# Altium PCB CM4IOv5.PcbDoc (part 3 of 4)
Units mm, origin at the board's own origin, x right, y up, seen from the top; angles counter-clockwise.
Board outline 160 x 90 mm, 4 copper layers (F.Cu, In1.Cu, In2.Cu, B.Cu); 151 components, 247 nets, 944 pads, 782 vias.
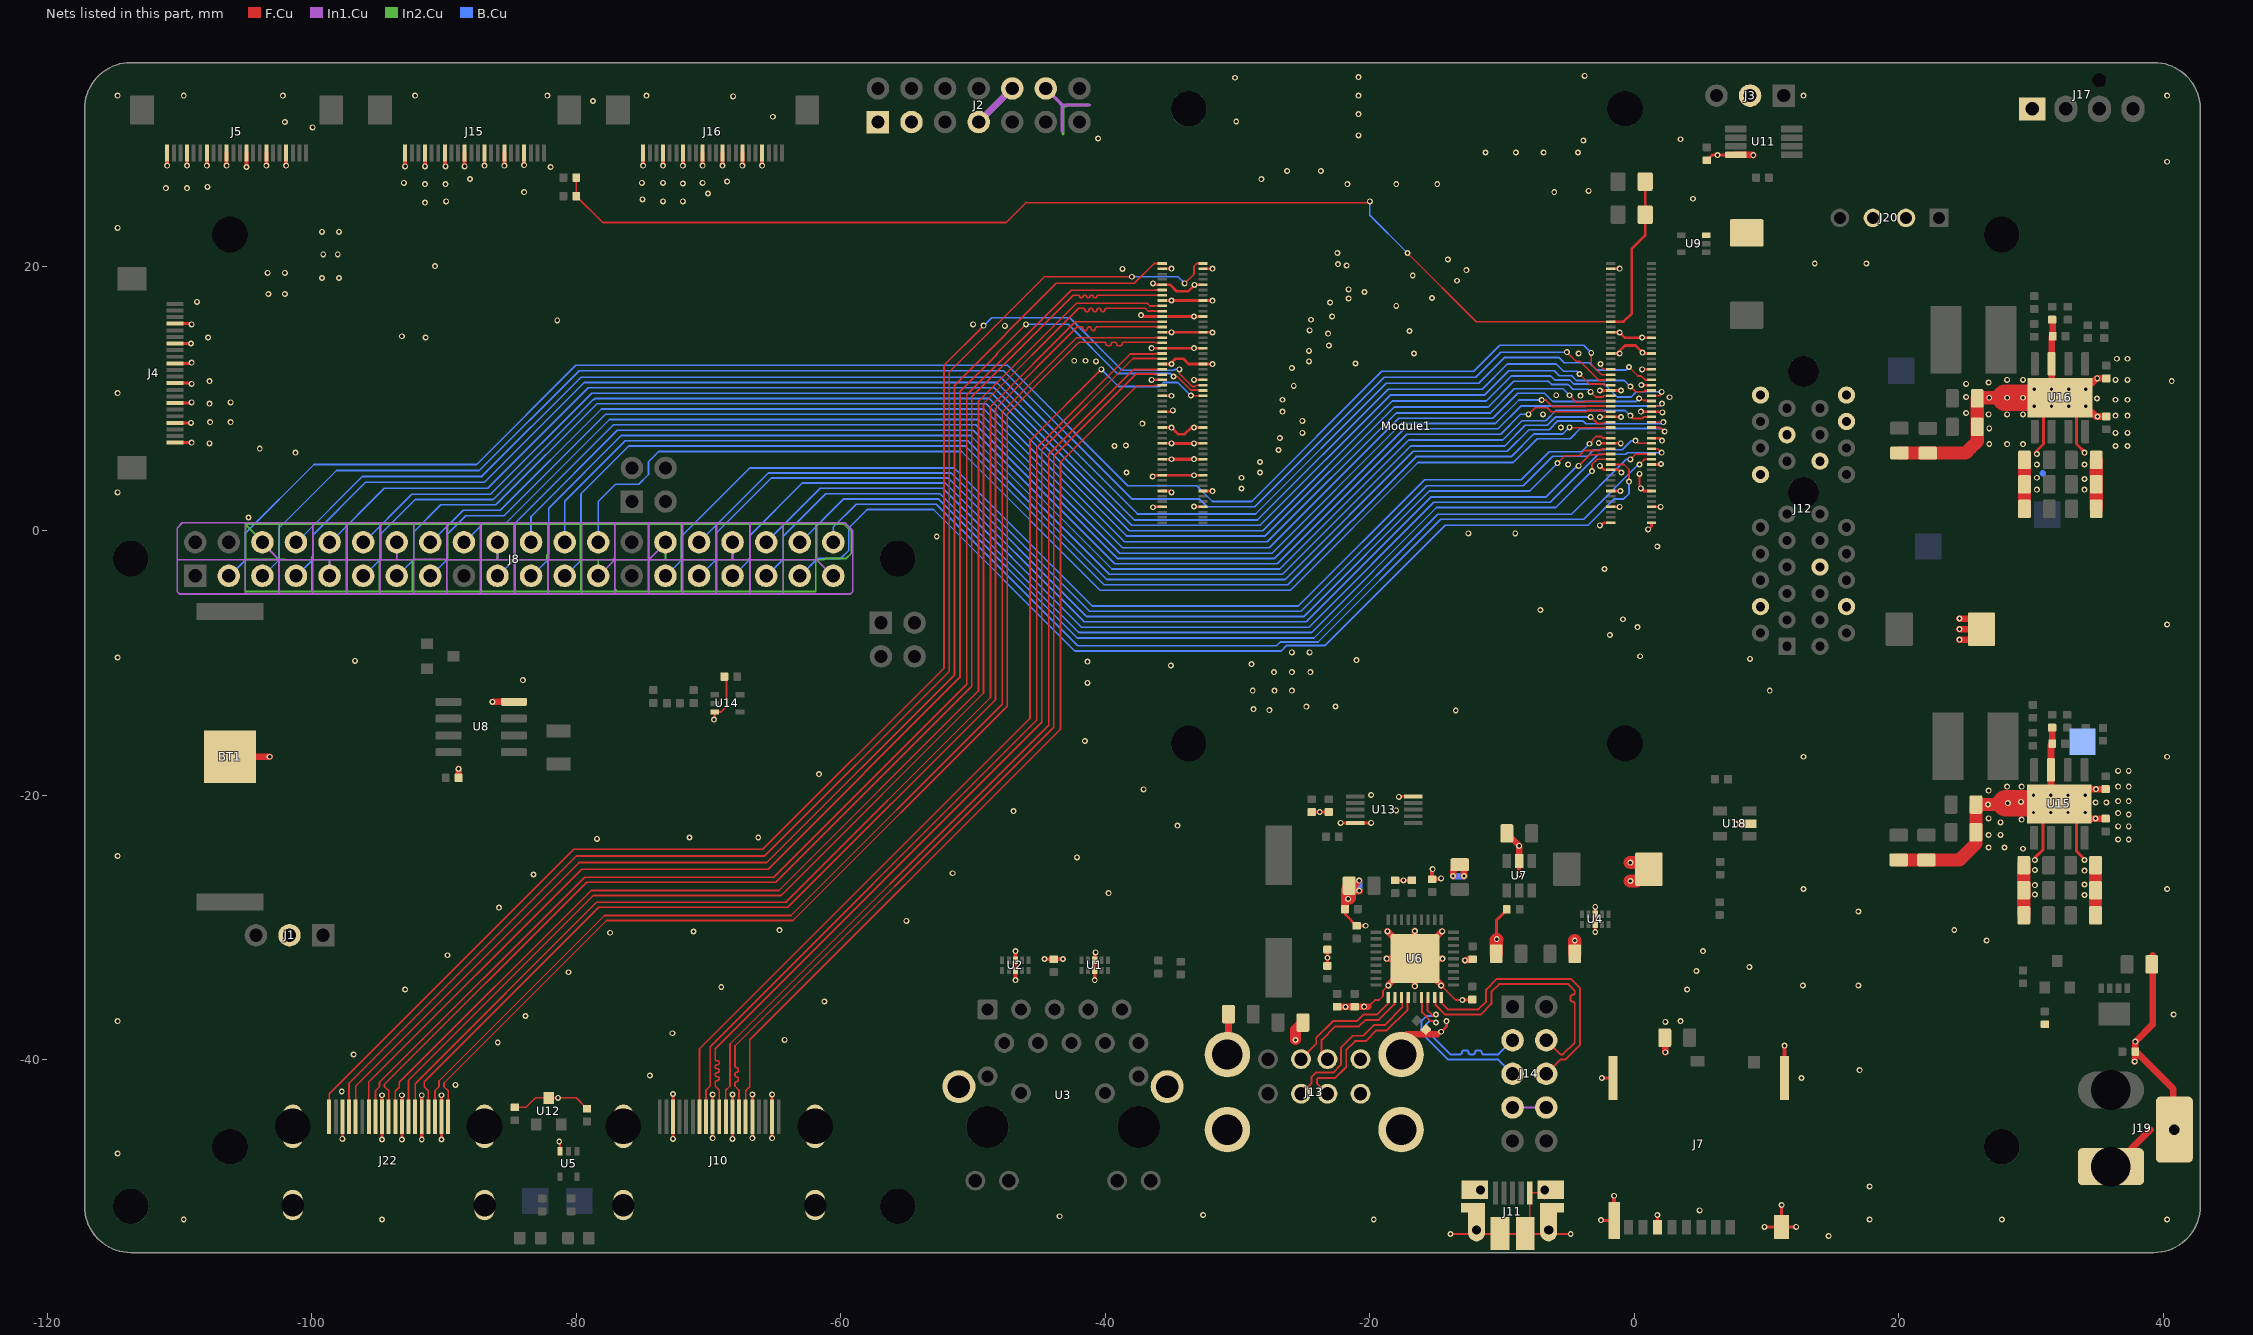
[diagram p5: the nets of this part, all layers, seen from the top]

## Via types
v1: diameter 0.45, hole 0.25, F.Cu to B.Cu, tented both sides, 782 vias

## Nets (pads, with @x,y where several pads share a name; then routed paths per layer and width w, separated by ;. In a path a pad name is that pad's centre, name@x,y a point inside that pad or via, vN(x,y) a via of type N, cw(c..) or ccw(c..) an arc to the next point about the centre after c; other vN are vias at no path point) (continued)
GND: BT1.2 C1.2 C2.2 C3.2 C4.2 C5.2 C6.2 C7.2 C8.2 C9.2 C10.2 C11.2 C12.2 C13.2 C14.2 C15.2 C16.2 C17.2 C18.2 C19.2 C20.2 C21.2 C22.2 C23.2 C25.2 C26.2 C27.2 C28.2 C30.2 C31.2 C32.2 C33.2 C34.2 C35.2 C36.2 C37.2 C38.2 C39.2 C41.2 C42.2 C43.2 C44.2 C45.2 C46.2 C47.2 C49.2 C51.2 C52.2 C58.2 C59.2 C60.2 C62.2 C63.2 C64.2 J1.2 J2.1 J2.3 J2.7 J2.10 J2.12 J3.2 J4.1 J4.4 J4.7 J4.10 J4.13 J4.16 J4.19 J5.1 J5.4 J5.7 J5.10 J5.13 J5.16 J5.19 J7.6 J7.11 J8.6 J8.9 J8.14 J8.20 J8.25 J8.30 J8.34 J8.39 J10.2 J10.5 J10.8 J10.11 J10.17 J10.SH1 J10.SH2 J10.SH3 J10.SH4 J11.5 J11.6 J12.A4 J12.A12 J12.A15 J12.A18 J12.B4 J12.B7 J12.B13 J12.B16 J12.B18 J13.4 J13.8 J13.MT1 J13.MT2 J13.MT3 J13.MT4 J14.7 J14.8 J15.1 J15.4 J15.7 J15.10 J15.13 J15.16 J15.19 J16.1 J16.4 J16.7 J16.10 J16.13 J16.16 J16.19 J17.1 J19.2 J19.3 J20.2 J20.3 J22.2 J22.5 J22.8 J22.11 J22.17 J22.SH1 J22.SH2 J22.SH3 J22.SH4 Module1.1 Module1.2 Module1.7 Module1.8 Module1.13 Module1.14 Module1.22 Module1.23 Module1.32 Module1.33 Module1.42 Module1.43 Module1.52 Module1.53 Module1.59 Module1.60 Module1.65 Module1.66 Module1.71 Module1.74 Module1.98 Module1.107 Module1.108 Module1.113 Module1.114 Module1.119 Module1.120 Module1.125 Module1.126 Module1.131 Module1.132 Module1.137 Module1.138 Module1.144 Module1.150 Module1.155 Module1.156 Module1.161 Module1.162 Module1.167 Module1.168 Module1.173 Module1.174 Module1.179 Module1.180 Module1.185 Module1.186 Module1.191 Module1.192 Module1.197 Module1.198 R11.2 R12.2 R13.2 R14.2 R15.1 R16.2 R26.2 R28.2 R30.2 R36.2 TP6.1 U1.3 U1.8 U2.3 U2.8 U3.19 U3.20 U4.3 U4.8 U5.3 U6.37 U7.2 U8.4 U9.3 U11.4 U12.3 U13.5 U13.10 U14.3 U15.7 U15.9 U16.7 U16.9 U18.2 | length 882.7
  F.Cu w0.13: C12.2@-84.9,-43.615 -83.815,-43.615 -83.1,-42.9 v1(-81.4,-42.9) ; U12.3@-82.1,-42.9 -80.015,-42.9 C13.2@-79.2,-43.715 ; v1(-81.3,-46.2) -81.25,-46.25 U5.3@-81.25,-46.95 ; U14.3@-69.532,-13.722 -69.087,-13.722 -68.65,-13.285 C22.2@-68.65,-11.203 ; v1@-35,9 v1(-34.9,9.1) ; -20.11,-36.01 -19.6,-35.5 -19.3,-35.5 -19,-35.2 -19,-34.8 v1(-18.6,-34.4) ; v1(-14.6,-34.4) -13.5,-35.5 v1(-13,-35.5) ; v1(-13.9,-53.2) -13.489,-53.2 -12.182,-53.2 -10.112,-53.2 -8.432,-53.2 -6.362,-53.2 -5.054,-53.2 v1(-4.8,-53.2) ; J11.6@-7.9,-52.813 J11.5@-7.9,-50.08 J11.6@-6.985,-50.08 ; v1(-2.555,12.6) -2.555,12.448 -2.307,12.2 Module1.60@-1.78,12.2 ; v1@-1.1,8.6 v1(-1,8.6) ; v1(0.4,4.3) 0.4,3.3 v1(0.5,3.2) ; J7.6@1.75,-53.165 1.75,-52.068 v1(1.75,-51.75) ; 1.8,7 1.9,7 ; v1(2.019,5.038) 2.057,5 v1@2.1,5
  F.Cu w0.2: v1@-69.532,-14.232 U14.3@-69.532,-13.722 ; v1(-37.3,16.3) -37.2,16.2 Module1.180@-35.7,16.2 v1(-33.3,16.2) Module1.179@-32.6,16.2 ; v1(-36.5,11.4) Module1.156@-35.7,11.4 ; v1(-36.5,13.8) Module1.168@-35.7,13.8 v1(-33.3,13.8) Module1.167@-32.62,13.8 ; v1(-36.425,4.1) -36.325,4.2 Module1.120@-35.7,4.2 v1@-33.3,4.2 ; v1(-36.4,1.77) -36.37,1.8 Module1.108@-35.7,1.8 ; v1(-36.4,18.7) -36.3,18.6 Module1.192@-35.7,18.6 -35.1,18.6 -34.6,18.1 -33.746,18.1 v1(-33.261,18.585) -33.246,18.6 Module1.191@-32.6,18.6 ; Module1.114@-35.7,3 -35.1,3 v1(-35,2.9) ; Module1.126@-35.7,5.4 v1(-35,5.4) ; Module1.132@-35.7,6.6 v1(-35,6.6) ; Module1.138@-35.7,7.8 -35.01,7.8 v1(-35,7.79) -34.71,7.5 -34.7,7.5 -34.5,7.3 -34,7.3 -33.5,7.8 v1(-33.3,7.8) Module1.137@-32.6,7.8 ; Module1.144@-35.7,9 -35.55,9 v1@-35,9 ; Module1.150@-35.7,10.2 v1(-35,10.2) ; Module1.162@-35.7,12.6 v1(-35,12.6) -35,12.7 -34.7,13 -34.1,13 -33.7,12.6 Module1.161@-32.62,12.6 ; Module1.174@-35.7,15 v1(-35,15) Module1.173@-32.62,15 ; Module1.186@-35.7,17.4 v1(-35,17.4) Module1.185@-32.62,17.4 ; Module1.198@-35.7,19.8 -35.01,19.8 v1(-35,19.81) ; v1(-33.3,1.83) -33.27,1.8 Module1.107@-32.6,1.8 ; v1(-33.3,4.19) -33.29,4.2 Module1.119@-32.62,4.2 ; v1(-33.3,5.41) Module1.125@-32.61,5.41 ; v1(-33.3,6.6) Module1.131@-32.62,6.6 ; v1(-33.298,11.407) -33.291,11.4 Module1.155@-32.6,11.4 ; Module1.113@-32.6,3 -31.909,3 v1(-31.899,2.99) ; Module1.161@-32.6,12.6 -31.91,12.6 v1(-31.9,12.59) ; Module1.173@-32.6,15 -31.91,15 v1(-31.9,14.99) ; Module1.185@-32.6,17.4 -31.91,17.4 v1(-31.9,17.39) ; Module1.197@-32.6,19.8 -31.91,19.8 v1(-31.9,19.81) ; R14.2@-21.869,-28.622 -21.869,-29.01 C14.2@-20.996,-29.883 ; v1@-17.77,-20.1 U13.10@-16.7,-20.1 ; -14.885,-38.085 v1@-14.7,-37.9 ; v1(-14.6,-37.9) -14.2,-37.5 v1(-14.2,-37.1) ; v1(-2.95,-30.35) U4.3@-2.95,-29.785 U4.8@-2.95,-29.015 v1(-2.95,-28.45) ; v1(-2.683,6.626) -2.657,6.6 Module1.32@-1.78,6.6 -1.022,6.6 v1(-1.019,6.603) ; v1(-2.6,0.4) -2.5,0.4 -2.3,0.6 Module1.2@-1.78,0.6 ; v1(-2.6,4.9) -2.3,4.6 Module1.22@-1.78,4.6 -1.18,4.6 v1(-0.973,4.393) ; v1(-2.6,8.6) Module1.42@-1.78,8.6 v1(-1,8.6) ; v1(-2.6,10.6) Module1.52@-1.78,10.6 v1(-1,10.6) ; Module1.8@-1.78,1.8 v1(-1.1,1.8) ; Module1.14@-1.78,3 v1@-1.1,3 ; Module1.66@-1.78,13.4 v1(-1.1,13.4) -1.1,13.6 -0.7,14 0.1,14 0.1,13.989 v1(0.625,13.463) 0.689,13.4 Module1.65@1.3,13.4 ; Module1.74@-1.78,15 -1.12,15 v1(-1.1,14.98) -0.72,14.6 v1(0.6,14.6) Module1.71@1.3,14.6 ; Module1.98@-1.78,19.8 -1.115,19.8 v1(-1.1,19.815) ; v1(0.5,3.2) 0.7,3 Module1.13@1.3,3 ; v1(0.5,9) Module1.43@1.3,9 2.076,9 v1(2.127,8.949) ; v1(0.533,11.01) 0.542,11 Module1.53@1.3,11 ; v1(0.6,12.2) Module1.59@1.3,12.2 ; v1@1.119,0.145 1.3,0.326 Module1.1@1.3,0.6 ; Module1.7@1.3,1.8 v1(1.995,1.8) ; Module1.23@1.3,5 1.981,5 v1(2.019,5.038) ; Module1.33@1.3,7 1.8,7 ; 1.9,7 v1(2.1,6.8)
  F.Cu w0.23: J4.1@-110.35,6.65 v1(-109.1,6.65) ; J4.4@-110.35,8.15 v1(-109.15,8.15) ; J4.7@-110.35,9.65 v1@-109.15,9.65 ; J4.10@-110.35,11.15 v1@-109.15,11.15 ; J4.13@-110.35,12.65 v1@-109.15,12.65 ; J4.16@-110.35,14.15 v1(-109.15,14.15) ; J4.19@-110.35,15.65 -109.15,15.65 v1(-109.1,15.6) ; v1(-109.45,27.6) J5.4@-109.45,28.55 ; v1(-97.7,-46) J22.17@-97.7,-44.82 ; v1(-94.7,-46.05) v1(-94.7,-42.7) ; v1(-93.2,-46.05) v1(-93.2,-42.7) ; v1@-91.7,-46.1 v1(-91.7,-42.7) ; v1@-90.2,-46.1 v1(-90.2,-42.7) ; v1(-86.95,27.6) J15.13@-86.95,28.55 ; v1(-72.7,-46) v1(-72.7,-42.6) ; v1(-69.7,-45.95) v1(-69.7,-42.65) ; v1(-68.2,-46) v1(-68.2,-42.65) ; v1(-66.7,-45.95) v1(-66.7,-42.65) ; v1(-65.2,-45.95) v1(-65.2,-42.65) ; v1(-35,5.4) -33.31,5.4 v1(-33.3,5.41) ; v1(-35,6.6) v1(-33.3,6.6) ; R11.2@-24.4,-21.285 v1(-23.785,-21.285) C7.2@-23.1,-21.285 ; C8.2@-23.2,-32.915 v1(-23.2,-32.3) C9.2@-23.2,-31.685 ; v1@-22.285,-22.1 v1(-22.2,-22.1) U13.5@-21.1,-22.1 v1(-19.9,-22.1) ; C14.2@-20.996,-29.883 v1(-20.317,-29.883) ; R16.2@-18.082,-26.446 v1(-17.454,-26.446) -17.232,-26.446 R12.2@-16.812,-26.446 ; v1(-13,-35.5) -12.703,-35.5 -12.66,-35.457 C11.2@-12.24,-35.457 ; v1(-10.4,-30.9) -10.4,-29.45 R36.2@-9.635,-28.685 ; v1(-2.52,-52.15) -2.495,-52.175 J7.11@-1.52,-52.175 ; v1(-2.45,-41.4) -2.44,-41.41 J7.11@-1.6,-41.41 ; v1(1.75,-51.75) 1.76,-51.76 J7.6@1.76,-52.675 ; C23.2@5.5,28.015 5.885,28.4 v1(6.3,28.4) 6.325,28.425 U11.4@7.688,28.425 ; v1(9.85,-52.65) J7.11@11.13,-52.65 ; J7.11@11.14,-52.66 12.24,-52.66 v1(12.25,-52.65) ; J7.11@11.15,-52.65 v1(11.15,-51) ; v1(30.3,-24.913) 30.3,-24.75 30.9,-24.15 U15.9@30.9,-21.862 ; v1@30.35,5.75 30.35,5.95 30.95,6.55 U16.9@30.95,8.8 ; U15.9@33.45,-21.912 33.45,-24.25 34.05,-24.85 v1(34.05,-24.913) ; U16.9@33.45,8.8 33.45,6.55 34.1,5.9 v1@34.1,5.75
  F.Cu w0.3: v1(-110.95,27.6) J5.1@-110.95,28.55 ; v1(-107.95,27.6) J5.7@-107.95,28.55 ; v1(-106.45,27.6) J5.10@-106.45,28.55 ; v1(-104.95,27.5) J5.13@-104.95,28.55 ; v1(-103.45,27.6) J5.16@-103.45,28.55 ; v1(-101.95,27.6) J5.19@-101.95,28.55 ; v1(-92.95,27.55) J15.1@-92.95,28.55 ; v1(-91.45,27.555) J15.4@-91.45,28.55 ; v1@-89.95,27.605 J15.7@-89.95,28.55 ; v1(-88.45,27.555) J15.10@-88.45,28.55 ; v1(-85.45,27.6) J15.16@-85.45,28.55 ; v1(-83.95,27.64) J15.19@-83.95,28.55 ; v1(-74.95,27.6) J16.1@-74.95,28.55 ; v1(-73.45,27.6) J16.4@-73.45,28.55 ; v1(-71.95,27.6) J16.7@-71.95,28.55 ; v1(-70.45,27.6) J16.10@-70.45,28.55 ; v1(-68.95,27.6) J16.13@-68.95,28.55 ; v1(-67.45,27.6) J16.16@-67.45,28.55 ; v1(-65.95,27.6) J16.19@-65.95,28.55 ; v1(-46.8,-34) U2.8@-46.8,-33.27 v1(-46.8,-31.8) ; v1(-44.6,-32.4) -44.585,-32.415 C1.2@-43.9,-32.415 -43.48,-32.415 -43.465,-32.4 v1(-43.2,-32.4) ; v1(-40.8,-34) U1.8@-40.8,-33.27 U1.3@-40.8,-32.5 -40.8,-31.96 v1(-40.732,-31.893) ; v1@-15.288,-25.638 R13.2@-15.288,-26.359 v1@-14.659,-26.359 ; v1(-8.7,-26) U7.2@-8.7,-25 ; J7.11@-1.52,-52.675 v1(-1.52,-50.3) ; J7.11@11.36,-41.91 v1(11.36,-38.95)
  F.Cu w0.5: BT1.2@-106.2,-17.1 v1(-103.2,-17.1) ; C46.2@-88.915,-18.7 v1(-88.915,-18.015) ; v1(-86.345,-12.945) U8.4@-84.725,-12.945 ; J13.MT3@-30.687,-40.648 C17.2@-30.687,-36.573 ; R15.1@-22.475,-36.01 v1(-21.84,-36.01) C3.2@-21.15,-36.01 v1@-20.435,-36.01 ; C10.2@-21.456,-26.844 -21.025,-27.275 -20.75,-27.275 v1(-20.8,-27.225) ; C10.2@-21.169,-26.844 v1(-20.8,-26.475) ; v1(-20.425,-36) -20.11,-36.01 ; v1(-18.725,-32.375) -18.718,-32.368 U6.37@-16.596,-32.368 ; v1(-18.664,-30.3) U6.37@-16.596,-32.368 ; v1(-18.6,-34.4) -18.6,-34.372 U6.37@-16.596,-32.368 ; J13.MT4@-17.185,-38.085 -14.885,-38.085 ; v1(-16.596,-34.446) U6.37@-16.596,-32.368 ; v1(-16.596,-30.279) U6.37@-16.596,-32.368 ; v1(-14.6,-34.4) -14.6,-34.364 U6.37@-16.596,-32.368 ; v1(-14.528,-30.3) U6.37@-16.596,-32.368 ; v1(-14.507,-32.368) U6.37@-16.596,-32.368 ; v1(-13.7,-26.125) -13.7,-25.763 C6.2@-13.2,-25.263 ; v1(-12.875,-26.125) C6.2@-12.875,-25.588 ; v1(-12.8,-32.5) -12.635,-32.5 C4.2@-12.545,-32.41 ; C2.2@-9.637,-22.9 v1(-8.7,-23.838) U7.2@-8.7,-25 ; v1(2.35,-39.45) C5.2@2.35,-38.388 ; U11.4@7.688,28.425 8.975,28.425 v1(9,28.4) ; v1(7.7,-22.2) 7.744,-22.156 U18.2@8.699,-22.156 ; v1(24.6,-8.25) C45.2@25.7,-8.25 ; v1(24.6,-7.45) C45.2@26.263,-7.45 ; v1(24.6,-6.65) C45.2@25.35,-6.65 ; U15.9@31.515,-20.028 U15.7@31.515,-18.1 C63.2@31.515,-16.212 ; U16.9@31.565,10.685 U16.7@31.565,12.612 C59.2@31.565,14.615 ; C63.2@31.615,-16.113 C64.2@31.615,-14.913 ; C59.2@31.65,14.7 C60.2@31.65,15.915 ; U15.9@33.265,-19.547 v1(34.915,-19.547) R30.2@35.65,-19.547 ; U16.9@34.15,9.4 34.915,8.635 v1(35.035,8.635) C58.2@35.7,8.635 ; U16.9@34.15,10.7 34.965,11.515 v1(35.015,11.515) R28.2@35.7,11.515 ; U15.9@34.565,-21.778 v1(34.885,-21.778) C62.2@35.65,-21.778 ; J19.2@36.05,-48.3 39.05,-45.3 ; v1(37.85,-40.15) 37.85,-39.855 37.885,-39.82 C36.2@37.885,-39.4 37.885,-38.98 37.9,-38.965 v1(37.9,-38.65) 39.2,-37.35 39.2,-32.1 ; C36.2@37.95,-39.4 40.75,-42.2 J19.3@40.75,-45.3
  F.Cu w0.6: R14.2@-21.869,-28.622 C10.2@-21.869,-27.153
  F.Cu w0.8: v1(-25.619,-38.519) -25.619,-37.756 C20.2@-25.063,-37.2
  F.Cu w1: v1@-21.559,-27.764 C10.2@-21.559,-26.844 ; C21.2@-10.437,-32 -10.437,-31.2 -10.437,-30.971 v1@-10.4,-30.934 ; C19.2@-4.5,-32 v1(-4.5,-31) ; v1(-0.3,-26.5) C16.2@0.213,-26.5 ; v1@-0.3,-25.1 C16.2@0.613,-25.1 ; C33.2@20,-24.9 C32.2@22.1,-24.9 24.6,-24.9 25.838,-23.663 C31.2@25.837,-22.812 C30.2@25.837,-20.713 v1(26.75,-20.713) 28,-20.713 v1@28.1,-20.612 ; C51.2@20.05,5.875 C52.2@22.188,5.875 ; C52.2@22.2,5.863 25.063,5.863 25.45,6.25 25.938,6.737 C49.2@25.937,7.85 C47.2@25.937,10 ; C47.2@25.988,10.05 v1(26.85,10.05) v1@28.05,10.05 ; C43.2@29.463,-29.012 C25.2@29.463,-25.312 ; C41.2@29.513,1.65 C34.2@29.513,5.35 ; C44.2@34.888,-29.012 C26.2@34.888,-25.312 ; C39.2@34.937,1.65 C35.2@34.937,5.35
  F.Cu w2: v1@28.05,10.05 29.45,10.05 U16.9@32.2,10.05 ; v1@28.1,-20.612 29.25,-20.612 U15.9@32.1,-20.612
  In1.Cu w0.13: J8.6@-103.75,-0.93 -102.48,-2.2 ; -102.5,-2.2 -102.5,-4.7 -102.6,-4.8 ; J8.9@-98.67,-3.47 -98.67,-2.268 -98.602,-2.2 ; -94.8,-2.2 -94.85,-2.15 ; J8.14@-93.59,-0.93 -93.59,-2.132 -93.6,-2.142 -93.6,-2.2 ; J8.20@-85.97,-0.93 -85.97,-2.132 -85.902,-2.2 ; J8.25@-78.35,-3.47 -77.08,-2.2 ; -77.25,-2.2 -77.1,-2.05 ; J8.30@-73.27,-0.93 -74.54,-2.2 ; J8.34@-68.19,-0.93 -68.19,-2.132 -68.122,-2.2 ; -66.85,-2.05 -66.95,-2.15 -66.95,-2.2 ; -61.9,-2.2 -61.9,0.6 ; J8.39@-60.57,-3.47 -61.84,-2.2 -66.95,-2.2 ; J14.7@-9.2,-43.62 J14.8@-6.66,-43.62 ; -110.2,-2.2 -110.2,-1.7 -110.2,0.2 -109.8,0.6 -105,0.6 ; -110.2,-2.2 -101.8,-2.2 -97.35,-2.2 -93.6,-2.2 ; -110.2,-2.2 -110.2,-4.6 -110,-4.8 -105,-4.8 ; -105,-4.8 -102.6,-4.8 ; -105,-4.8 -105.05,-4.75 -105.05,-4.35 -105.05,-0.05 -105.05,0.55 -105,0.6 ; -105,0.6 -100,0.6 ; -102.6,-4.8 -99.9,-4.8 ; -100,0.6 -99.95,0.55 -99.95,-0.2 -99.95,-4.2 -99.95,-4.75 -99.9,-4.8 ; -100,0.6 -97.3,0.6 ; -99.9,-4.8 -97.3,-4.8 ; -97.3,-4.8 -94.8,-4.8 ; -97.3,-4.8 -97.35,-4.75 -97.35,-4.35 -97.35,-0.05 -97.35,0.55 -97.3,0.6 ; -97.3,0.6 -94.8,0.6 ; -94.85,-2.15 -94.85,-4.75 -94.8,-4.8 ; -94.85,-2.15 -94.85,0.25 -94.85,0.55 -94.8,0.6 ; -94.8,-4.8 -92.4,-4.8 ; -94.8,0.6 -92.3,0.6 ; -93.6,-2.2 -92.268,-2.182 -89.8,-2.15 -89.75,-2.2 -82.15,-2.2 -77,-2.2 -74.54,-2.2 ; -92.4,-4.8 -89.8,-4.8 ; -92.4,-4.8 -92.3,-4.7 -92.3,0.15 -92.3,0.6 ; -92.3,0.6 -89.8,0.6 ; -89.8,-4.8 -87.3,-4.8 ; -89.8,-4.8 -89.8,-4.25 -89.8,0.6 ; -89.8,0.6 -87.2,0.6 ; -87.3,-4.8 -84.7,-4.8 ; -87.3,-4.8 -87.25,-4.75 -87.25,-4.25 -87.25,-0.1 -87.25,0.55 -87.2,0.6 ; -87.2,0.6 -84.7,0.6 ; -84.7,-4.8 -82.2,-4.8 ; -84.7,-4.8 -84.65,-4.75 -84.65,-4.35 -84.65,-0.25 -84.65,0.55 -84.7,0.6 ; -84.7,0.6 -82.1,0.6 ; -82.2,-4.8 -79.6,-4.8 ; -82.2,-4.8 -82.15,-4.75 -82.15,-4.2 -82.15,-0.25 -82.15,0.55 -82.1,0.6 ; -82.1,0.6 -79.5,0.6 ; -79.6,-4.8 -79.6,-2.2 -79.6,-0.3 -79.6,0.5 -79.5,0.6 ; -79.6,-4.8 -77.1,-4.8 ; -79.5,0.6 -77.1,0.6 ; -77.1,-4.8 -77.1,-4.4 -77.1,-0.15 -77.1,0.6 ; -77.1,-4.8 -74.5,-4.8 ; -77.1,0.6 -74.6,0.6 ; -74.6,0.6 -72,0.6 ; -74.6,0.6 -74.54,0.54 -74.54,-2.2 ; -74.54,-2.2 -66.95,-2.2 ; -74.54,-2.2 -74.54,-4.19 -74.54,-4.76 -74.5,-4.8 ; -74.5,-4.8 -72,-4.8 ; -72,-4.8 -71.95,-4.75 -71.95,-4.15 -71.95,0.55 -72,0.6 ; -72,-4.8 -69.5,-4.8 ; -72,0.6 -69.5,0.6 ; -69.5,-4.8 -66.8,-4.8 ; -69.5,-4.8 -69.45,-4.75 -69.45,-2.05 -69.45,0.15 -69.45,0.55 -69.5,0.6 ; -69.5,0.6 -66.9,0.6 ; -66.9,0.6 -66.85,0.55 -66.85,-0.1 -66.85,-4.35 -66.85,-4.75 -66.8,-4.8 ; -66.9,0.6 -64.5,0.6 ; -66.8,-4.8 -64.3,-4.8 ; -64.5,0.6 -61.9,0.6 ; -64.5,0.6 -64.35,0.45 -64.35,-0.2 -64.35,-4.25 -64.35,-4.75 -64.3,-4.8 ; -64.3,-4.8 -59.3,-4.8 -59.1,-4.6 -59.1,-0.803 -59.1,0 -59.7,0.6 -61.9,0.6
  In1.Cu w0.23: J2.12@-44.5,33.44 -43.26,32.2 ; -43.26,30.24 -43.26,32.2 ; -41.2,32.2 -43.26,32.2
  In1.Cu w0.5: J2.7@-49.58,30.9 J2.10@-47.04,33.44
  In2.Cu w0.13: J8.6@-103.75,-0.93 -102.9,-1.78 -102.9,-1.8 -102.5,-2.2 -102,-2.2 ; J8.6@-103.75,-0.8 -105,0.45 ; J8.9@-98.67,-3.47 -98.67,-2.268 -98.602,-2.2 ; -94.8,-2.2 -94.8,0.05 -94.8,0.5 ; J8.14@-93.59,-0.93 -93.59,-2.132 -93.522,-2.2 ; -89.85,-2.2 -89.8,-2.25 -89.8,-4.3 -89.8,-4.5 -89.7,-4.6 ; -89.8,-2.2 -89.75,-2.15 -89.75,-1.6 -89.75,0.2 -89.75,0.45 -89.7,0.5 ; J8.20@-85.97,-0.93 -85.97,-2.07 -86,-2.1 -86,-2.2 ; -82.2,-2.25 -82.25,-2.2 ; J8.25@-78.35,-3.47 -78.35,-2.25 -78.3,-2.2 ; -78.35,-2.268 -78.4,-2.218 -78.4,-2.2 ; -73.3,-2.2 -73.3,-2.162 -73.27,-2.132 J8.30@-73.27,-0.93 ; -72.05,-4.55 -72.05,-2.2 -72.05,0.45 -72,0.5 ; -68.3,-2.2 -68.19,-2.09 J8.34@-68.19,-0.93 ; -61.84,-2.2 J8.39@-60.57,-3.47 ; -105.05,-2.18 -105,-2.13 -105,0.45 ; -105.05,-2.18 -105.05,-4.55 -105,-4.6 -102.5,-4.6 ; -105.05,-2.18 -102.48,-2.18 ; -105,0.45 -104.95,0.5 -102.5,0.5 ; -102.5,-4.6 -102.48,-4.58 -102.48,-3.92 -102.48,-2.18 ; -102.5,-4.6 -99.9,-4.6 ; -102.5,0.5 -102.48,0.48 -102.48,-2.18 ; -102.5,0.5 -99.9,0.5 ; -102.48,-2.18 -102.02,-2.18 -102,-2.2 ; -102,-2.2 -97.4,-2.2 ; -99.9,-4.6 -97.4,-4.6 ; -99.9,-4.6 -100,-4.5 -100,-4.25 -100,-2.2 -100,-2 -99.95,-1.95 -99.95,0 -99.95,0.45 -99.9,0.5 ; -99.9,0.5 -97.4,0.5 ; -97.4,-4.6 -94.9,-4.6 ; -97.4,-4.6 -97.4,-4.2 -97.4,-2.2 ; -97.4,-2.2 -97.4,0.25 -97.4,0.4 -97.4,0.5 ; -97.4,-2.2 -94.9,-2.2 ; -97.4,0.5 -94.8,0.5 ; -94.9,-4.6 -94.9,-2.2 ; -94.9,-4.6 -92.4,-4.6 ; -94.9,-2.2 -92.4,-2.2 ; -94.8,0.5 -92.3,0.5 ; -92.4,-4.6 -92.4,-4.4 -92.4,-2.2 ; -92.4,-4.6 -89.7,-4.6 ; -92.4,-2.2 -92.3,-2.2 ; -92.3,-2.2 -92.3,-0.05 -92.3,0.5 ; -92.3,-2.2 -89.9,-2.2 -87.2,-2.2 ; -92.3,0.5 -89.7,0.5 ; -89.7,-4.6 -87.1,-4.6 ; -89.7,0.5 -87.2,0.5 ; -87.2,-2.2 -87.2,-4.25 -87.2,-4.5 -87.1,-4.6 ; -87.2,-2.2 -87.2,0.5 ; -87.2,-2.2 -86,-2.2 ; -87.2,0.5 -84.7,0.5 ; -87.1,-4.6 -84.6,-4.6 ; -86,-2.2 -84.7,-2.2 ; -84.7,-2.2 -82.25,-2.2 ; -84.7,-2.2 -84.7,-4.05 -84.7,-4.5 -84.6,-4.6 ; -84.7,-2.2 -84.7,0.5 ; -84.7,0.5 -82.1,0.5 ; -84.6,-4.6 -82,-4.6 ; -82.25,-2.2 -82.25,-1.85 -82.1,-1.7 -82.1,-0.2 -82.1,0.5 ; -82.25,-2.2 -82.1,-2.2 ; -82.1,-2.2 -79.7,-2.2 ; -82.1,-2.2 -82.15,-2.25 -82.15,-4 -82.15,-4.45 -82,-4.6 ; -82.1,0.5 -79.7,0.5 ; -82,-4.6 -79.5,-4.6 ; -79.7,-2.2 -78.4,-2.2 ; -79.7,-2.2 -79.7,0.2 -79.7,0.5 ; -79.7,-2.2 -79.7,-2.3 -79.65,-2.35 -79.65,-4.15 -79.65,-4.45 -79.5,-4.6 ; -79.7,0.5 -77.2,0.5 ; -79.5,-4.6 -77,-4.6 ; -78.4,-2.2 -78.3,-2.2 ; -78.3,-2.2 -77.25,-2.2 -74.55,-2.2 ; -77.2,0.5 -74.5,0.5 ; -77.2,0.5 -77.1,0.4 -77.1,0.15 -77.1,-2.2 -77.1,-4.4 -77,-4.5 -77,-4.6 ; -77,-4.6 -74.5,-4.6 ; -74.55,-2.2 -74.55,-4.35 -74.55,-4.55 -74.5,-4.6 ; -74.55,-2.2 -74.55,-0.1 -74.55,0.45 -74.5,0.5 ; -74.55,-2.2 -61.3,-2.2 -61.2,-2.1 -59.65,-2.1 -59.6,-2.1 -59.2,-1.7 -59.2,-0.703 -59.2,-0.1 -59.8,0.5 -61.9,0.5 ; -74.5,-4.6 -69.4,-4.6 ; -74.5,0.5 -72,0.5 ; -72,0.5 -69.4,0.5 ; -69.4,-4.6 -66.9,-4.6 ; -69.4,-4.6 -69.4,-2.2 -69.4,0.5 ; -69.4,0.5 -66.9,0.5 ; -66.9,-4.6 -66.9,-4.4 -66.9,-2.2 -66.9,-0.1 -66.9,0.5 ; -66.9,-4.6 -64.3,-4.6 ; -66.9,0.5 -64.4,0.5 ; -64.4,0.5 -61.9,0.5 ; -64.4,0.5 -64.35,0.45 -64.35,0.15 -64.35,-2.2 -64.35,-4.55 -64.3,-4.6 ; -64.3,-4.6 -61.9,-4.6 -61.9,-4.2 -61.9,-2.2 -61.9,-2.05 -61.85,-2 -61.85,-0.3 -61.85,0.45 -61.9,0.5
  In2.Cu w0.23: J2.12@-44.5,33.44 -43.405,32.345 -43.405,32.305 -43.2,32.1 ; -43.2,30 -43.2,32.1 ; -41.3,32.2 -42.9,32.2 -43,32.1 -43.2,32.1
  In2.Cu w0.5: J2.7@-49.58,30.9 J2.10@-47.04,33.44
  B.Cu w0.5: v1(-20.8,-27.225) v1(-20.8,-26.475) ; v1(-13.7,-26.125) v1(-12.875,-26.125)
  other v1: 14.7,-53.35 -109.7,-52.1 -94.7,-52.1 -19.7,-52.1 17.8,-52.1 27.8,-52.1 40.3,-52.1 -43.45,-51.85 -32.6,-51.75 4.95,-51.4 17.8,-49.6 -114.7,-47.1 -91.7,-46.05 -90.2,-46.05 -97.75,-42.413 -89.15,-41.912 12.65,-41.4 -74.45,-41.213 17.05,-40.8 -96.85,-39.612 -85.95,-38.713 -64.25,-38.513 -72.75,-38.012 2.35,-37.15 -114.7,-37.1 3.5,-37.1 -83.85,-36.712 40.8,-36.6 -61.25,-35.612 -92.95,-34.7 4,-34.7 -69.05,-34.512 12.75,-34.4 16.95,-34.4 -80.6,-33.4 4.7,-33.3 8.7,-33 -89.75,-32.113 5.2,-31.8 26.65,-31 -77.45,-30.412 -71.15,-30.312 -64.65,-30.212 24.2,-30.2 -55.05,-29.512 16.95,-28.8 -85.85,-28.513 -21.641,-27.845 34.05,-27.563 30.3,-27.513 -39.75,-27.413 12.8,-27.1 40.3,-27.1 30.3,-26.812 34.05,-26.762 -14.6,-26.3 -83.25,-26.013 -51.55,-25.913 34.05,-25.712 30.3,-25.662 -15.25,-25.6 -0.3,-25.11 -42.15,-24.713 -114.7,-24.6 29.4,-24.06 26.8,-23.96 28,-23.96 36.6,-23.363 37.4,-23.363 -78.45,-23.313 -71.45,-23.213 -66.25,-23.213 26.8,-23.012 27.7,-23.01 36.6,-22.363 37.4,-22.363 -34.55,-22.313 27.7,-22.063 29.3,-21.862 26.8,-21.762 37.4,-21.462 36.6,-21.362 -46.95,-21.213 -18,-21.15 28.25,-20.612 34.9,-20.562 35.7,-20.562 29.25,-20.512 36.6,-20.462 37.4,-20.462 -17.8,-20.13 -19.9,-20 26.8,-19.663 -37.1,-19.563 28.2,-19.362 29.3,-19.362 36.6,-19.362 37.4,-19.362 -61.65,-18.413 36.6,-18.163 37.4,-18.163 12.8,-17.1 40.3,-17.1 -41.55,-15.913 -69.6,-14.3 -27.598,-13.58 -13.5,-13.6 -28.8,-13.5 -24.8,-13.31 -22.6,-13.3 -28.85,-12.1 -27.2,-12.1 -25.9,-12.1 10.25,-12.1 -41.35,-11.512 -84.05,-11.31 -27.25,-10.7 -25.9,-10.7 -24.5,-10.7 -35.05,-10.2 -28.95,-10.1 -41.35,-9.912 -96.75,-9.85 -21,-9.8 8.75,-9.7 -114.7,-9.6 0.45,-9.5 -25.9,-9.2 -24.55,-9.2 -1.85,-7.9 0.25,-7.3 40.3,-7.1 -0.85,-6.7 -7.1,-6 -2.25,-2.9 1.75,-1.2 -52.75,-0.45 -12.55,-0.2 -9,-0.2 1.05,0.1 -104.8,1 -114.7,2.9 -1.05,3 30.45,3.1 34.05,3.1 -29.7,3.19 34.05,3.9 -29.7,4 30.45,4 -38.4,4.4 -28.3,4.4 -5,5 30.45,5 34.05,5 -28.3,5.19 30.45,5.8 -101.25,5.9 34.05,5.9 -26.9,6.1 -103.95,6.2 -39.3,6.4 36.4,6.4 37.3,6.4 -38.45,6.44 28.2,6.54 29.4,6.54 26.85,6.55 -107.75,6.6 -26.8,7 -25.1,7.4 36.4,7.4 37.3,7.4 26.85,7.74 -5.55,7.799 -37.2,8.09 -107.7,8.2 -106.15,8.2 -25.1,8.3 36.4,8.7 37.3,8.7 -6.9,8.8 26.8,8.8 28.2,8.8 29.4,8.8 25.1,8.9 -26.6,9 -107.75,9.6 -109.1,9.7 -106.15,9.7 -26.6,9.9 36.4,9.9 37.3,9.9 35,10 28.2,10.05 29.4,10.05 2.68,10.086 25.1,10.1 -4.066,10.207 -5.9,10.24 -114.7,10.4 -25.75,10.95 -109.1,11.1 25.1,11.1 26.8,11.2 -107.75,11.3 40.65,11.3 28.2,11.4 29.4,11.4 36.4,11.4 37.3,11.4 -25.9,12.3 -21.081,12.645 -109.1,12.7 -40.7,12.8 -24.6,12.8 -42.35,12.85 -41.5,12.85 36.5,13 37.3,13 -16.65,13.4 -4.2,13.4 -24.6,13.6 -23.1,14 -107.85,14.6 -91.4,14.6 -93.2,14.7 -23.15,14.9 -17,15.1 -24.55,15.15 -47.6,15.49 -50,15.6 -81.45,15.9 -24.45,15.95 -22.85,16.2 -18,17 -23,17.25 -108.7,17.3 -21.6,17.55 -15.3,17.6 -103.3,17.9 -102.05,17.9 -20.4,18.05 -21.6,18.25 -13.4,18.9 -99.25,19.1 -97.95,19.1 -16.75,19.3 -103.35,19.5 -102.05,19.5 -12.7,19.7 -38.7,19.8 -90.7,20 -21.75,20.05 -22.4,20.15 13.65,20.2 17.55,20.2 -14.1,20.5 -99.15,20.9 -98.05,20.9 -22.45,21 -99.25,22.6 -97.95,22.6 -114.7,22.9 -91.45,24.8 -89.85,24.9 -73.45,24.9 -71.95,24.9 -75,25.055 4.45,25.1 -70.05,25.5 -83.95,25.6 -6.05,25.6 -3.45,25.7 -111.05,25.9 -109.45,25.9 -107.9,26 -91.45,26.2 -89.9,26.2 -21.7,26.2 -18,26.2 -14.9,26.2 -71.95,26.25 -93.05,26.3 -75.05,26.3 -73.45,26.3 -70.45,26.3 -68.6,26.4 -28.2,26.58 -88.05,26.6 -26.25,27.2 -23.7,27.2 -81.95,27.5 -89.9,27.555 40.3,27.9 -11.25,28.6 -8.95,28.6 -6.85,28.6 -4.25,28.6 -3.85,29.5 3.5,29.6 -40.542,29.655 -20.85,29.9 -99.95,30.5 -102.05,30.9 -30.1,30.937 -65.15,31.3 -20.85,31.5 -78.75,32.5 -68.15,32.85 -114.7,32.9 -109.7,32.9 -102.2,32.9 -92.2,32.9 -82.2,32.9 -74.7,32.9 -20.85,32.9 12.8,32.9 40.3,32.9 -30.2,34.25 -20.85,34.3 -3.75,34.4
GPIO2: J8.3 Module1.58 | length 122.9
  F.Cu w0.13: v1(-3.25,13.45) -3.25,12.57 -2.48,11.8 Module1.58@-1.78,11.8
  B.Cu w0.13: J8.3@-106.29,-3.47 -105.05,-2.23 -105.05,-0.2 -99.85,5 -87.55,5 -80.05,12.5 -47.4,12.5 -38.3,3.4 -33.1,3.4 -31.9,2.2 -28.937,2.2 -19.087,12.05 -12.15,12.05 -10.175,14.025 -3.825,14.025 v1(-3.25,13.45)
GPIO3: J8.5 Module1.56 | length 119.8
  F.Cu w0.13: v1(-5.1,13.5) -4.4,12.8 -4.1,12.8 -2.7,11.4 Module1.56@-1.78,11.4
  B.Cu w0.13: J8.5@-103.75,-3.47 -102.5,-2.22 -102.5,0.2 -98.15,4.55 -87.35,4.55 -79.8,12.1 -47.7,12.1 -38,2.4 -32.9,2.4 -32.3,1.8 -28.7,1.8 -18.9,11.6 -12,11.6 -10.1,13.5 v1(-5.1,13.5)
GPIO4: J8.7 Module1.54 | length 116.5
  F.Cu w0.13: v1(-4.14,11.847) -3.383,11.09 -2.365,11.09 -2.275,11 Module1.54@-1.78,11
  B.Cu w0.13: J8.7@-101.21,-3.47 -99.9,-2.16 -99.9,-0.3 -95.95,3.65 -86.95,3.65 -79.4,11.2 -48.2,11.2 -37.8,0.8 -28.5,0.8 -18.6,10.7 -11.5,10.7 -9.6,12.6 -5.9,12.6 -5.35,12.05 -4.343,12.05 v1(-4.14,11.847)
GPIO5: J8.29 Module1.34 | length 85.7
  F.Cu w0.13: v1(-3.385,6.57) -3.16,6.795 -3.16,6.874 -2.918,7.116 -2.448,7.116 -2.332,7 Module1.34@-1.78,7
  B.Cu w0.13: J8.29@-73.27,-3.47 -72.05,-2.25 -72.05,-0.425 -66.885,4.74 -51.44,4.74 -41,-5.7 -25.4,-5.7 -15.85,3.85 -8.55,3.85 -6.434,5.966 -3.989,5.966 v1(-3.385,6.57)
GPIO6: J8.31 Module1.30 | length 82.8
  F.Cu w0.13: v1(-5.8,5.1) -5.241,5.659 -4.167,5.659 -3.764,6.062 -2.605,6.062 -2.537,6.13 -2.47,6.13 -2.4,6.2 Module1.30@-1.78,6.2
  B.Cu w0.13: J8.31@-70.73,-3.47 -69.45,-2.19 -69.45,-0.2 -65.27,3.98 -51.88,3.98 -41.4,-6.5 -25,-6.5 -15.5,3 -7.9,3 v1(-5.8,5.1)
GPIO7: J8.26 Module1.37 | length 96.5
  F.Cu w0.13: Module1.37@1.3,7.8 1.875,7.8 1.95,7.725 2.075,7.725 v1(2.3,7.5)
  B.Cu w0.13: J8.26@-78.35,-0.88 -78.35,2.2 -77.05,3.5 -75.3,3.5 -74.55,4.25 -74.55,5.2 -73.77,5.98 -50.88,5.98 -40.4,-4.5 -26,-4.5 -16.35,5.15 -9.15,5.15 -7.344,6.956 -4.852,6.956 -4.083,7.725 2.075,7.725 v1(2.3,7.5)
GPIO8: J8.24 Module1.39 | length 98.5
  F.Cu w0.13: Module1.39@1.3,8.2 v1(2.2,8.2)
  B.Cu w0.13: J8.24@-80.89,-0.93 -80.89,2.21 -76.3,6.8 -50.4,6.8 -39.9,-3.7 -26.4,-3.7 -16.7,6 -9.6,6 -7.961,7.639 -6.435,7.639 -5.775,8.299 -3.899,8.299 -3.675,8.075 2.075,8.075 v1(2.2,8.2)
GPIO9: J8.21 Module1.40 | length 97.8
  F.Cu w0.13: v1(-3.3,8.6) -2.81,8.11 -2.365,8.11 -2.275,8.2 Module1.40@-1.78,8.2
  B.Cu w0.13: J8.21@-83.43,-3.47 -82.1,-2.14 -82.1,1.7 -76.6,7.2 -50.2,7.2 -39.7,-3.3 -26.6,-3.3 -16.9,6.4 -9.8,6.4 -8.231,7.969 -6.572,7.969 -5.941,8.6 v1(-3.3,8.6)
GPIO10: J8.19 Module1.44 | length 100
  F.Cu w0.13: v1(-8,8.8) -7.5,9.3 -6.575,9.3 -6.275,9 -3.625,9 -3.535,9.09 -2.365,9.09 -2.275,9 Module1.44@-1.78,9
  B.Cu w0.13: J8.19@-85.97,-3.47 -84.7,-2.2 -84.7,0.5 -77.2,8 -49.8,8 -39.3,-2.5 -27,-2.5 -17.2,7.3 -10.1,7.3 -8.6,8.8 v1(-8,8.8)
GPIO11: J8.23 Module1.38 | length 95.5
  F.Cu w0.13: v1(-4.9,7.809) -4.867,7.776 -2.232,7.776 -2.208,7.8 Module1.38@-1.78,7.8
  B.Cu w0.13: J8.23@-80.89,-3.47 -79.65,-2.23 -79.65,2.8 -76.05,6.4 -50.6,6.4 -40.1,-4.1 -26.2,-4.1 -16.5,5.6 -9.3,5.6 -7.591,7.309 -5.4,7.309 v1(-4.9,7.809)
GPIO12: J8.32 Module1.31 | length 84
  F.Cu w0.13: v1(0.1,6.8) 0.3,6.6 Module1.31@1.3,6.6
  B.Cu w0.13: J8.32@-70.73,-0.88 -65.49,4.36 -51.66,4.36 -41.2,-6.1 -25.2,-6.1 -15.7,3.4 -8.4,3.4 -6.164,5.636 -3.531,5.636 -3.053,6.113 -0.905,6.113 -0.218,6.8 v1(0.1,6.8)
GPIO13: J8.33 Module1.28 | length 80
  F.Cu w0.13: v1(-4.2,4.9) -3.368,5.732 -2.468,5.732 -2.4,5.8 Module1.28@-1.78,5.8
  B.Cu w0.13: J8.33@-68.19,-3.47 -66.9,-2.18 -66.9,-0.387 -62.913,3.6 -52.1,3.6 -41.6,-6.9 -24.8,-6.9 -15.35,2.55 -6.65,2.55 -4.3,4.9 v1(-4.2,4.9)
GPIO14: J8.8 Module1.55 | length 117.8
  F.Cu w0.13: v1(-0.398,12.38) 0.282,11.7 0.52,11.7 0.82,11.4 Module1.55@1.3,11.4
  B.Cu w0.13: J8.8@-101.21,-0.93 -96.18,4.1 -87.15,4.1 -79.65,11.6 -47.9,11.6 -37.56,1.26 -28.64,1.26 -18.75,11.15 -11.75,11.15 -9.8,13.1 -5.7,13.1 -5.3,12.7 -3.4,12.7 -2.855,12.155 -0.623,12.155 v1(-0.398,12.38)
GPIO15: J8.10 Module1.51 | length 114.7
  F.Cu w0.13: v1(-0.3,10.9) 0.105,10.495 0.715,10.495 0.82,10.6 Module1.51@1.3,10.6
  B.Cu w0.13: J8.10@-98.67,-0.93 -94.54,3.2 -86.7,3.2 -79.1,10.8 -48.4,10.8 -38,0.4 -28.3,0.4 -18.45,10.25 -11.35,10.25 -9.5,12.1 -6.06,12.1 -5.68,11.72 -4.738,11.72 -4.375,11.357 -0.757,11.357 v1(-0.3,10.9)
GPIO16: J8.36 Module1.29 | length 80.1
  F.Cu w0.13: Module1.29@1.3,6.2 1.775,6.2 v1(2.075,5.9)
  B.Cu w0.13: J8.36@-65.65,-0.88 -61.57,3.2 -52.3,3.2 -41.8,-7.3 -24.6,-7.3 -15.15,2.15 -6.35,2.15 -2.717,5.783 -0.632,5.783 -0.515,5.9 v1(2.075,5.9)
GPIO17: J8.11 Module1.50 | length 110.7
  F.Cu w0.13: v1(-3.3,10.5) -2.91,10.11 -2.365,10.11 -2.275,10.2 Module1.50@-1.78,10.2
  B.Cu w0.13: J8.11@-96.13,-3.47 -94.8,-2.14 -94.8,-0.25 -92.2,2.35 -86.3,2.35 -78.75,9.9 -78.7,9.9 -78.6,10 -48.8,10 -38.4,-0.4 -27.9,-0.4 -18.15,9.35 -11.05,9.35 -9.1,11.3 -6.5,11.3 -6.26,11.06 -5.012,11.06 -4.648,10.697 -3.497,10.697 v1(-3.3,10.5)
GPIO18: J8.12 Module1.49 | length 113.9
  F.Cu w0.13: Module1.49@1.3,10.2 1.918,10.2 2.075,10.357 v1(2.075,10.5)
  B.Cu w0.13: J8.12@-96.13,-0.93 -92.45,2.75 -86.5,2.75 -78.85,10.4 -48.6,10.4 -38.2,0 -28.1,0 -18.3,9.8 -11.2,9.8 -9.3,11.7 -6.32,11.7 -6.01,11.39 -4.875,11.39 -4.575,11.09 -2.27,11.09 -1.29,10.11 -0.232,10.11 0.158,10.5 v1(2.075,10.5)
GPIO19: J8.35 Module1.26 | length 77.6
  F.Cu w0.13: v1(-3.2,4.495) -3.2,5 -2.8,5.4 Module1.26@-1.78,5.4
  B.Cu w0.13: J8.35@-65.65,-3.47 -64.35,-2.17 -64.35,-0.412 -61.138,2.8 -52.5,2.8 -42,-7.7 -24.4,-7.7 -14.95,1.75 -5.945,1.75 v1(-3.2,4.495)
GPIO20: J8.38 Module1.27 | length 75.9
  F.Cu w0.13: v1(-0.3,5.39) 0.11,5.8 Module1.27@1.3,5.8
  B.Cu w0.13: J8.38@-63.11,-0.93 -59.78,2.4 -52.637,2.4 -42.119,-8.119 -24.219,-8.119 -14.85,1.25 -4.75,1.25 -0.61,5.39 v1(-0.3,5.39)
GPIO21: J8.40 Module1.25 | length 74.1
  F.Cu w0.13: v1(0.4,5) 0.8,5.4 Module1.25@1.3,5.4
  B.Cu w0.13: J8.40@-60.57,-0.93 -60.57,0.272 -58.842,2 -52.8,2 -42.1,-8.7 -27.06,-8.7 -26.78,-8.42 -23.92,-8.42 -14.632,0.868 -3.832,0.868 0.3,5 v1(0.4,5)
GPIO22: J8.15 Module1.46 | length 104.8
  F.Cu w0.13: v1(-7,9.88) -6.682,9.88 -6.188,9.387 -3.694,9.387 -3.661,9.42 Module1.46@-1.8,9.42
  B.Cu w0.13: J8.15@-91.05,-3.47 -89.8,-2.22 -89.8,-0.3 -88.375,1.125 -85.475,1.125 -77.8,8.8 -49.4,8.8 -38.9,-1.7 -27.4,-1.7 -17.6,8.1 -10.5,8.1 -8.72,9.88 v1(-7,9.88)
GPIO23: J8.16 Module1.47 | length 105.8
  F.Cu w0.13: v1(0.371,9.988) 0.469,9.89 0.683,9.89 0.738,9.835 0.939,9.835 Module1.47@0.974,9.8
  B.Cu w0.13: J8.16@-91.05,-0.93 -88.57,1.55 -85.75,1.55 -78.1,9.2 -49.2,9.2 -38.7,-1.3 -27.6,-1.3 -17.8,8.5 -10.7,8.5 -8.81,10.39 -6.79,10.39 -6.163,9.763 0.146,9.763 v1(0.371,9.988)
GPIO24: J8.18 Module1.45 | length 104.6
  F.Cu w0.13: Module1.45@1.3,9.4 1.9,9.4 v1(2.1,9.6)
  B.Cu w0.13: J8.18@-88.51,-0.93 -87.04,0.54 -85.36,0.54 -77.5,8.4 -49.6,8.4 -39.1,-2.1 -27.2,-2.1 -17.4,7.7 -10.3,7.7 -8.58,9.42 1.92,9.42 v1(2.1,9.6)
GPIO25: J8.22 Module1.41 | length 99.1
  F.Cu w0.13: v1(-0.3,8.7) -0.075,8.475 0.597,8.475 0.722,8.6 Module1.41@1.3,8.6
  B.Cu w0.13: J8.22@-83.43,-0.93 -83.43,1.07 -76.9,7.6 -50,7.6 -39.5,-2.9 -26.8,-2.9 -17.05,6.85 -9.95,6.85 -8.49,8.31 -6.698,8.31 -5.918,9.09 -0.69,9.09 v1(-0.3,8.7)
GPIO26: J8.37 Module1.24 | length 78.5
  F.Cu w0.13: Module1.24@-1.78,5 -0.773,5 -0.4,4.627 v1(-0.4,3.7)
  B.Cu w0.13: J8.37@-63.11,-3.47 -61.74,-2.1 -60,-2.1 -59.4,-1.5 -59.4,0.2 -58,1.6 -53,1.6 -42.3,-9.1 -26.7,-9.1 -26.28,-8.68 -23.38,-8.68 -14.3,0.4 -3.5,0.4 -1.5,2.4 -0.8,2.4 -0.4,2.8 v1(-0.4,3.7)
GPIO27: J8.13 Module1.48 | length 108
  F.Cu w0.13: v1(-4.9,10.24) -4.377,9.717 -3.831,9.717 -3.773,9.775 Module1.48@-1.805,9.775
  B.Cu w0.13: J8.13@-93.59,-3.47 -92.3,-2.18 -92.3,-0.1 -90.25,1.95 -86.1,1.95 -78.45,9.6 -49,9.6 -38.55,-0.85 -27.75,-0.85 -18,8.9 -10.9,8.9 -9.07,10.73 -5.39,10.73 v1(-4.9,10.24)
GPIO_VREF: Module1.78 R4.2 R5.2 R6.1 R7.1 | length 97.8
  F.Cu w0.13: R6.1@-80.015,26.7 R7.1@-80.015,25.3 -78.015,23.3 -47.5,23.3 -46,24.8 -20.1,24.8 v1(-20,24.9) ; v1(-17.15,21) -11.95,15.8 Module1.78@-1.78,15.8
  F.Cu w0.2: Module1.78@-1.78,15.8 -0.8,15.8 -0.2,16.4 -0.2,21.3 0.825,22.325 R5.2@0.825,23.9 R4.2@0.825,26.4
  B.Cu w0.13: v1(-20,24.9) -20,23.85 v1(-17.15,21)
HD1_N: J13.2 U6.1 | length 8.7
  F.Cu w0.147: J13.2@-25.2,-39.97 -24.05,-38.82 -24.05,-38.367 -22.783,-37.1 -20.983,-37.1 -20.483,-36.6 -19.483,-36.6 U6.1@-18.546,-35.663
HD1_P: J13.3 U6.2 | length 8.1
  F.Cu w0.147: J13.3@-23.65,-39.52 -23.65,-38.533 -22.617,-37.5 -20.817,-37.5 -20.317,-37 -19.317,-37 -18.146,-35.829 U6.2@-18.146,-35.355
HD2_N: J13.6 U6.3 | length 12.1
  F.Cu w0.147: J13.6@-25.2,-42.59 -24.4,-41.79 -24.4,-41.317 -24.078,-40.995 -22.778,-40.995 -22.182,-40.399 -22.182,-39.099 -21.283,-38.2 -20.483,-38.2 -19.683,-37.4 -18.883,-37.4 -17.546,-36.063 U6.3@-17.546,-35.355
HD2_P: J13.7 U6.4 | length 12.1
  F.Cu w0.147: J13.7@-23.2,-42.59 -24,-41.79 -24,-41.483 -23.912,-41.395 -22.612,-41.395 -21.782,-40.565 -21.782,-39.265 -21.117,-38.6 -20.317,-38.6 -19.517,-37.8 -18.717,-37.8 -17.146,-36.229 U6.4@-17.146,-35.355
HD3_N: J14.3 U6.6 | length 12.2
  F.Cu w0.147: U6.6@-16.046,-35.355 -16.046,-36.437 -15.383,-37.1 -15.1,-37.1 v1(-15,-37.2)
  B.Cu w0.147: v1(-15,-37.2) -15.1,-37.1 -15.517,-37.1 -15.7,-37.283 -15.7,-37.817 -13.907,-39.61 -13.185,-39.61 -13.153,-39.606 -13.121,-39.595 -13.093,-39.578 -13.07,-39.554 -13.052,-39.526 -13.041,-39.495 -13.034,-39.429 -13.023,-39.398 -13.005,-39.37 -12.982,-39.347 -12.954,-39.329 -12.923,-39.318 -12.89,-39.315 -12.685,-39.315 -12.653,-39.318 -12.621,-39.329 -12.593,-39.347 -12.57,-39.37 -12.552,-39.398 -12.541,-39.429 -12.534,-39.495 -12.523,-39.526 -12.505,-39.554 -12.482,-39.578 -12.454,-39.595 -12.423,-39.606 -12.39,-39.61 -12.185,-39.61 -12.153,-39.606 -12.121,-39.595 -12.093,-39.578 -12.07,-39.554 -12.052,-39.526 -12.041,-39.495 -12.034,-39.429 -12.023,-39.398 -12.005,-39.37 -11.982,-39.347 -11.954,-39.329 -11.923,-39.318 -11.89,-39.315 -11.685,-39.315 -11.653,-39.318 -11.621,-39.329 -11.593,-39.347 -11.57,-39.37 -11.552,-39.398 -11.541,-39.429 -11.534,-39.495 -11.523,-39.526 -11.505,-39.554 -11.482,-39.578 -11.454,-39.595 -11.423,-39.606 -11.39,-39.61 -10.27,-39.61 J14.3@-9.2,-38.54
HD3_P: J14.5 U6.7 | length 12.1
  F.Cu w0.147: U6.7@-15.646,-35.355 -15.646,-36.271 -15.217,-36.7 -15.1,-36.7 v1(-15,-36.6)
  B.Cu w0.147: v1(-15,-36.6) -15.1,-36.7 -15.683,-36.7 -16.1,-37.117 -16.1,-37.983 -14.073,-40.01 -10.27,-40.01 J14.5@-9.2,-41.08
HD4_N: J14.4 U6.8 | length 20.3
  F.Cu w0.147: U6.8@-15.046,-35.355 -15.046,-35.837 -14.283,-36.6 -11.617,-36.6 -10.8,-35.783 -10.8,-34.883 -10.217,-34.3 -4.983,-34.3 -4.5,-34.783 -4.5,-34.95 -4.504,-34.986 -4.516,-35.02 -4.535,-35.051 -4.561,-35.077 -4.592,-35.096 -4.626,-35.108 -4.699,-35.117 -4.733,-35.129 -4.764,-35.148 -4.789,-35.174 -4.809,-35.204 -4.821,-35.239 -4.825,-35.275 -4.825,-35.45 -4.821,-35.486 -4.809,-35.52 -4.789,-35.551 -4.764,-35.577 -4.733,-35.596 -4.699,-35.608 -4.626,-35.617 -4.592,-35.629 -4.561,-35.648 -4.535,-35.674 -4.516,-35.704 -4.504,-35.739 -4.5,-35.775 -4.5,-38.717 -5.393,-39.61 -5.59,-39.61 J14.4@-6.66,-38.54
HD4_P: J14.6 U6.9 | length 20.3
  F.Cu w0.147: U6.9@-14.646,-35.671 -14.117,-36.2 -11.783,-36.2 -11.2,-35.617 -11.2,-34.717 -10.383,-33.9 -4.817,-33.9 -4.1,-34.617 -4.1,-38.883 -5.227,-40.01 -5.59,-40.01 J14.6@-6.66,-41.08
HDMI0_CEC: J22.13 Module1.151 | length 104.2
  F.Cu w0.13: J22.13@-95.7,-44.32 -95.7,-41.7 -79.6,-25.6 -65.5,-25.6 -51,-11.1 -51,10.5 -48.2,13.3 -48.2,13.4 v1(-46,15.6) ; v1(-34.847,11.653) -34.553,11.653 -33.54,10.64 Module1.151@-32.66,10.64
  B.Cu w0.13: v1(-46,15.6) -42.8,15.6 -39.078,11.878 -35.072,11.878 v1(-34.847,11.653)
HDMI0_CK_N: J22.12 Module1.190 | length 99.6
  F.Cu w0.127: J22.12@-95.2,-44.32 -95.2,-42.37 -94.89,-42.06 -94.89,-41.721 -79.379,-26.21 -65.079,-26.21 -50.49,-11.621 -50.49,10.279 -42.579,18.19 -36.235,18.19 -36.225,18.2 Module1.190@-35.7,18.2
HDMI0_CK_P: J22.10 Module1.188 | length 99.6
  F.Cu w0.127: J22.10@-94.2,-44.32 -94.2,-42.37 -94.51,-42.06 -94.51,-41.879 -79.221,-26.59 -64.921,-26.59 -50.11,-11.779 -50.11,10.121 -42.421,17.81 -42.04,17.81 -42.019,17.808 -41.998,17.801 -41.98,17.789 -41.965,17.774 -41.954,17.756 -41.947,17.736 -41.942,17.693 -41.935,17.673 -41.923,17.655 -41.908,17.639 -41.89,17.628 -41.87,17.621 -41.849,17.619 -41.78,17.619 -41.759,17.621 -41.738,17.628 -41.72,17.639 -41.705,17.655 -41.694,17.673 -41.687,17.693 -41.682,17.736 -41.675,17.756 -41.663,17.774 -41.648,17.789 -41.63,17.801 -41.61,17.808 -41.589,17.81 -41.52,17.81 -41.499,17.808 -41.478,17.801 -41.46,17.789 -41.445,17.774 -41.434,17.756 -41.427,17.736 -41.422,17.693 -41.415,17.673 -41.403,17.655 -41.388,17.639 -41.37,17.628 -41.35,17.621 -41.329,17.619 -41.26,17.619 -41.239,17.621 -41.218,17.628 -41.2,17.639 -41.185,17.655 -41.174,17.673 -41.167,17.693 -41.162,17.736 -41.155,17.756 -41.143,17.774 -41.128,17.789 -41.11,17.801 -41.09,17.808 -41.069,17.81 -41,17.81 -40.979,17.808 -40.958,17.801 -40.94,17.789 -40.925,17.774 -40.914,17.756 -40.907,17.736 -40.902,17.693 -40.895,17.673 -40.883,17.655 -40.868,17.639 -40.85,17.628 -40.83,17.621 -40.809,17.619 -40.74,17.619 -40.719,17.621 -40.698,17.628 -40.68,17.639 -40.665,17.655 -40.654,17.673 -40.647,17.693 -40.642,17.736 -40.635,17.756 -40.623,17.774 -40.608,17.789 -40.59,17.801 -40.57,17.808 -40.549,17.81 -36.235,17.81 -36.225,17.8 Module1.188@-35.7,17.8
HDMI0_D0_N: J22.9 Module1.184 | length 98.2
  F.Cu w0.127: J22.9@-93.7,-44.82 -93.7,-42.41 -93.39,-42.1 -93.39,-41.721 -78.879,-27.21 -64.679,-27.21 -49.59,-12.121 -49.59,9.779 -42.179,17.19 -36.821,17.19 -36.621,16.99 -36.235,16.99 -36.225,17 Module1.184@-35.7,17
HDMI0_D0_P: J22.7 Module1.182 | length 98.2
  F.Cu w0.127: J22.7@-92.7,-44.82 -92.7,-41.569 -78.721,-27.59 -64.521,-27.59 -49.21,-12.279 -49.21,9.621 -42.021,16.81 -41.66,16.81 -41.632,16.807 -41.606,16.798 -41.582,16.783 -41.562,16.763 -41.547,16.739 -41.538,16.713 -41.532,16.657 -41.523,16.631 -41.508,16.607 -41.488,16.587 -41.464,16.572 -41.438,16.563 -41.41,16.56 -41.36,16.56 -41.332,16.563 -41.306,16.572 -41.282,16.587 -41.262,16.607 -41.247,16.631 -41.238,16.657 -41.232,16.713 -41.223,16.739 -41.208,16.763 -41.188,16.783 -41.164,16.798 -41.138,16.807 -41.11,16.81 -41.06,16.81 -41.032,16.807 -41.006,16.798 -40.982,16.783 -40.962,16.763 -40.947,16.739 -40.938,16.713 -40.932,16.657 -40.923,16.631 -40.908,16.607 -40.888,16.587 -40.864,16.572 -40.838,16.563 -40.81,16.56 -40.76,16.56 -40.732,16.563 -40.706,16.572 -40.682,16.587 -40.662,16.607 -40.647,16.631 -40.638,16.657 -40.632,16.713 -40.623,16.739 -40.608,16.763 -40.588,16.783 -40.564,16.798 -40.538,16.807 -40.51,16.81 -40.46,16.81 -40.432,16.807 -40.406,16.798 -40.382,16.783 -40.362,16.763 -40.347,16.739 -40.338,16.713 -40.332,16.657 -40.323,16.631 -40.308,16.607 -40.288,16.587 -40.264,16.572 -40.238,16.563 -40.21,16.56 -40.16,16.56 -40.132,16.563 -40.106,16.572 -40.082,16.587 -40.062,16.607 -40.047,16.631 -40.038,16.657 -40.032,16.713 -40.023,16.739 -40.008,16.763 -39.988,16.783 -39.964,16.798 -39.938,16.807 -39.91,16.81 -36.979,16.81 -36.779,16.61 -36.235,16.61 -36.225,16.6 Module1.182@-35.7,16.6
HDMI0_D1_N: J22.6 Module1.178 | length 95.7
  F.Cu w0.127: J22.6@-92.2,-44.32 -92.2,-41.831 -78.479,-28.11 -64.179,-28.11 -48.69,-12.621 -48.69,9.379 -42.279,15.79 -36.235,15.79 -36.225,15.8 Module1.178@-35.7,15.8
HDMI0_D1_P: J22.4 Module1.176 | length 95.8
  F.Cu w0.127: J22.4@-91.2,-44.32 -91.2,-42.37 -91.51,-42.06 -91.51,-41.679 -78.321,-28.49 -64.021,-28.49 -48.31,-12.779 -48.31,9.221 -42.121,15.41 -41.81,15.41 -41.778,15.406 -41.748,15.396 -41.72,15.379 -41.698,15.356 -41.681,15.329 -41.67,15.298 -41.663,15.234 -41.652,15.204 -41.635,15.177 -41.612,15.154 -41.585,15.137 -41.555,15.126 -41.523,15.123 -41.51,15.123 -41.478,15.126 -41.448,15.137 -41.42,15.154 -41.398,15.177 -41.381,15.204 -41.37,15.234 -41.363,15.298 -41.352,15.329 -41.335,15.356 -41.312,15.379 -41.285,15.396 -41.255,15.406 -41.223,15.41 -41.21,15.41 -41.178,15.406 -41.148,15.396 -41.12,15.379 -41.098,15.356 -41.081,15.329 -41.07,15.298 -41.063,15.234 -41.052,15.204 -41.035,15.177 -41.012,15.154 -40.985,15.137 -40.955,15.126 -40.923,15.123 -40.91,15.123 -40.878,15.126 -40.848,15.137 -40.82,15.154 -40.798,15.177 -40.781,15.204 -40.77,15.234 -40.763,15.298 -40.752,15.329 -40.735,15.356 -40.712,15.379 -40.685,15.396 -40.655,15.406 -40.623,15.41 -36.235,15.41 -36.225,15.4 Module1.176@-35.7,15.4
HDMI0_D2_N: J22.3 Module1.172 | length 93.8
  F.Cu w0.127: J22.3@-90.7,-44.32 -90.7,-42.37 -90.39,-42.06 -90.39,-41.621 -77.879,-29.11 -63.779,-29.11 -47.79,-13.121 -47.79,8.979 -42.179,14.59 -36.235,14.59 -36.225,14.6 Module1.172@-35.7,14.6
HDMI0_D2_P: J22.1 Module1.170 | length 93.7
  F.Cu w0.127: J22.1@-89.7,-44.32 -89.7,-42.37 -90.01,-42.06 -90.01,-41.779 -77.721,-29.49 -63.621,-29.49 -47.41,-13.279 -47.41,8.821 -41.991,14.24 -40.09,14.24 -40.062,14.237 -40.036,14.228 -40.012,14.213 -39.992,14.193 -39.977,14.169 -39.968,14.143 -39.962,14.087 -39.953,14.061 -39.938,14.037 -39.918,14.017 -39.894,14.002 -39.868,13.993 -39.84,13.99 -39.68,13.99 -39.652,13.993 -39.626,14.002 -39.602,14.017 -39.582,14.037 -39.567,14.061 -39.558,14.087 -39.552,14.143 -39.543,14.169 -39.528,14.193 -39.508,14.213 -39.484,14.228 -39.458,14.237 -39.43,14.24 -39.27,14.24 -39.242,14.237 -39.216,14.228 -39.192,14.213 -39.172,14.193 -39.157,14.169 -39.148,14.143 -39.142,14.087 -39.133,14.061 -39.118,14.037 -39.098,14.017 -39.074,14.002 -39.048,13.993 -39.02,13.99 -38.86,13.99 -38.832,13.993 -38.806,14.002 -38.782,14.017 -38.762,14.037 -38.747,14.061 -38.738,14.087 -38.732,14.143 -38.723,14.169 -38.708,14.193 -38.688,14.213 -38.664,14.228 -38.638,14.237 -38.61,14.24 -36.22,14.24 -36.18,14.2 Module1.170@-35.7,14.2
HDMI0_HOTPLUG: J22.19 Module1.153 | length 108
  F.Cu w0.13: J22.19@-98.7,-44.32 -98.7,-42.6 -80.2,-24.1 -65.9,-24.1 -52.2,-10.4 -52.2,12.5 v1(-49.2,15.5) ; v1(-34.4,12.2) -34.4,11.882 -33.418,10.9 -33.2,10.9 -33.1,11 Module1.153@-32.62,11
  B.Cu w0.13: v1(-49.2,15.5) -48.6,16.1 -42.7,16.1 -38.738,12.138 -34.78,12.138 -34.718,12.2 v1(-34.4,12.2)
HDMI0_SCL: J22.15 Module1.200 | length 101.9
  F.Cu w0.13: J22.15@-96.7,-44.32 -96.7,-42 -79.8,-25.1 -65.6,-25.1 -51.4,-10.9 -51.4,11 -43.7,18.7 -37.8,18.7 -36.3,20.2 Module1.200@-35.7,20.2
HDMI0_SDA: J22.16 Module1.199 | length 106.8
  F.Cu w0.13: J22.16@-97.2,-44.32 -97.2,-41.8 -80,-24.6 -65.75,-24.6 -51.8,-10.65 -51.8,12 -44.6,19.2 v1(-38,19.2) ; v1(-34,18.7) -33.3,19.4 -33.3,20 -33.1,20.2 Module1.199@-32.62,20.2
  B.Cu w0.13: v1(-38,19.2) -34.5,19.2 v1(-34,18.7)
HDMI1_CEC: J10.13 Module1.149 | length 77.9
  F.Cu w0.13: J10.13@-70.7,-44.32 -70.7,-39.2 -45.7,-14.2 -45.7,6.8 v1(-40.3,12.2) ; v1(-33.537,10.22) -33.517,10.2 Module1.149@-32.62,10.2
  B.Cu w0.13: v1(-40.3,12.2) -39,10.9 -35.9,10.9 -35.6,11.2 -34.517,11.2 v1(-33.537,10.22)
HDMI1_CK_N: J10.12 Module1.166 | length 73.9
  F.Cu w0.127: J10.12@-70.2,-44.82 -70.2,-42.31 -69.89,-42 -69.89,-39.021 -45.19,-14.321 -45.19,6.279 -38.109,13.36 -36.22,13.36 -36.18,13.4 Module1.166@-35.7,13.4
HDMI1_CK_P: J10.10 Module1.164 | length 73.9
  F.Cu w0.127: J10.10@-69.2,-44.32 -69.2,-42.31 -69.51,-42 -69.51,-41.74 -69.506,-41.707 -69.495,-41.675 -69.477,-41.646 -69.454,-41.623 -69.425,-41.605 -69.393,-41.594 -69.36,-41.59 -69.343,-41.59 -69.31,-41.586 -69.278,-41.575 -69.25,-41.557 -69.226,-41.534 -69.208,-41.505 -69.197,-41.473 -69.193,-41.44 -69.197,-41.407 -69.208,-41.375 -69.226,-41.346 -69.25,-41.323 -69.278,-41.305 -69.31,-41.294 -69.343,-41.29 -69.36,-41.29 -69.393,-41.286 -69.425,-41.275 -69.454,-41.257 -69.477,-41.234 -69.495,-41.205 -69.506,-41.173 -69.51,-41.14 -69.506,-41.107 -69.495,-41.075 -69.477,-41.046 -69.454,-41.023 -69.425,-41.005 -69.393,-40.994 -69.36,-40.99 -69.343,-40.99 -69.31,-40.986 -69.278,-40.975 -69.25,-40.957 -69.226,-40.934 -69.208,-40.905 -69.197,-40.873 -69.193,-40.84 -69.197,-40.807 -69.208,-40.775 -69.226,-40.746 -69.25,-40.723 -69.278,-40.705 -69.31,-40.694 -69.343,-40.69 -69.36,-40.69 -69.393,-40.686 -69.425,-40.675 -69.454,-40.657 -69.477,-40.634 -69.495,-40.605 -69.506,-40.573 -69.51,-40.54 -69.506,-40.507 -69.495,-40.475 -69.477,-40.446 -69.454,-40.423 -69.425,-40.405 -69.393,-40.394 -69.36,-40.39 -69.343,-40.39 -69.31,-40.386 -69.278,-40.375 -69.25,-40.357 -69.226,-40.334 -69.208,-40.305 -69.197,-40.273 -69.193,-40.24 -69.197,-40.207 -69.208,-40.175 -69.226,-40.146 -69.25,-40.123 -69.278,-40.105 -69.31,-40.094 -69.343,-40.09 -69.36,-40.09 -69.393,-40.086 -69.425,-40.075 -69.454,-40.057 -69.477,-40.034 -69.495,-40.005 -69.506,-39.973 -69.51,-39.94 -69.51,-39.179 -44.81,-14.479 -44.81,6.121 -37.911,13.02 -36.2,13.02 -36.18,13 Module1.164@-35.7,13
HDMI1_D0_N: J10.9 Module1.160 | length 71.5
  F.Cu w0.127: J10.9@-68.7,-44.32 -68.7,-42.31 -68.39,-42 -68.39,-38.821 -44.29,-14.721 -44.29,5.779 -37.889,12.18 -36.2,12.18 -36.18,12.2 Module1.160@-35.7,12.2
HDMI1_D0_P: J10.7 Module1.158 | length 71.4
  F.Cu w0.127: J10.7@-67.7,-44.32 -67.7,-42.31 -68.01,-42 -68.01,-41.79 -68.007,-41.762 -67.998,-41.736 -67.983,-41.712 -67.963,-41.692 -67.939,-41.677 -67.913,-41.668 -67.857,-41.662 -67.831,-41.653 -67.807,-41.638 -67.787,-41.618 -67.772,-41.594 -67.763,-41.568 -67.76,-41.54 -67.76,-41.44 -67.763,-41.412 -67.772,-41.386 -67.787,-41.362 -67.807,-41.342 -67.831,-41.327 -67.857,-41.318 -67.913,-41.312 -67.939,-41.303 -67.963,-41.288 -67.983,-41.268 -67.998,-41.244 -68.007,-41.218 -68.01,-41.19 -68.01,-41.09 -68.007,-41.062 -67.998,-41.036 -67.983,-41.012 -67.963,-40.992 -67.939,-40.977 -67.913,-40.968 -67.857,-40.962 -67.831,-40.953 -67.807,-40.938 -67.787,-40.918 -67.772,-40.894 -67.763,-40.868 -67.76,-40.84 -67.76,-40.74 -67.763,-40.712 -67.772,-40.686 -67.787,-40.662 -67.807,-40.642 -67.831,-40.627 -67.857,-40.618 -67.913,-40.612 -67.939,-40.603 -67.963,-40.588 -67.983,-40.568 -67.998,-40.544 -68.007,-40.518 -68.01,-40.49 -68.01,-38.979 -43.91,-14.879 -43.91,5.621 -37.691,11.84 -36.22,11.84 -36.18,11.8 Module1.158@-35.7,11.8
HDMI1_D1_N: J10.6 Module1.154 | length 69.5
  F.Cu w0.127: J10.6@-67.2,-44.32 -67.2,-42.37 -66.89,-42.06 -66.89,-38.521 -66.884,-38.516 -43.39,-15.021 -43.39,5.179 -37.609,10.96 -36.289,10.96 -36.249,11 Module1.154@-35.7,11